# Altium PCB Stamp_C6LoRa_SMD.PcbDoc
Units mm, origin at the board's own origin, x right, y up, seen from the top; angles counter-clockwise.
Board outline 50.07 x 50.07 mm, 6 copper layers (Top/L1, GND/L2, L3, L4, PWR/L5, Bot/L6), stack 0.81 mm thick; 1 components, 79 nets, 88 pads, 0 vias.
Unrouted connection lines stored in the file: 58.
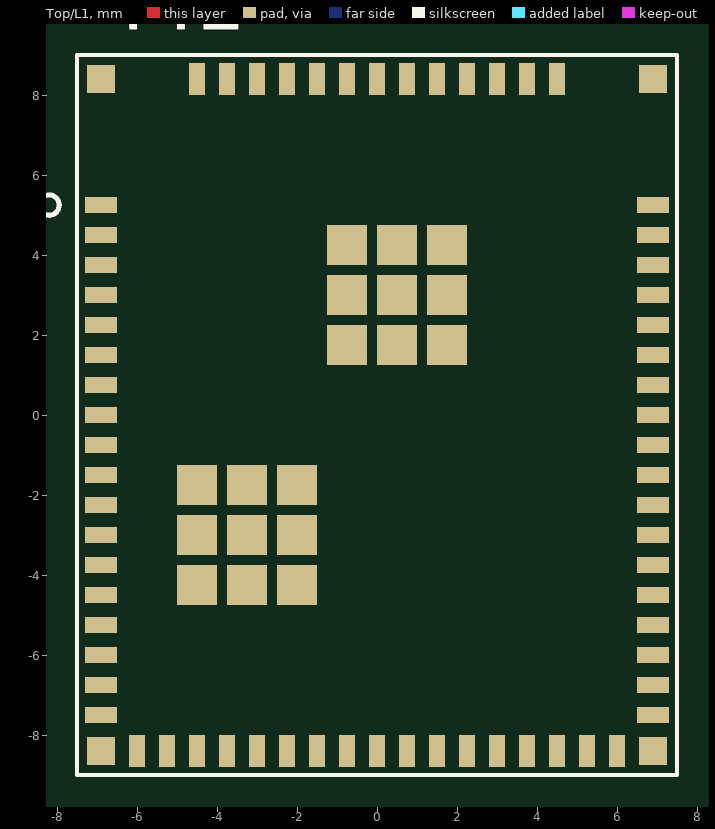
[diagram p0: Top/L1 view]
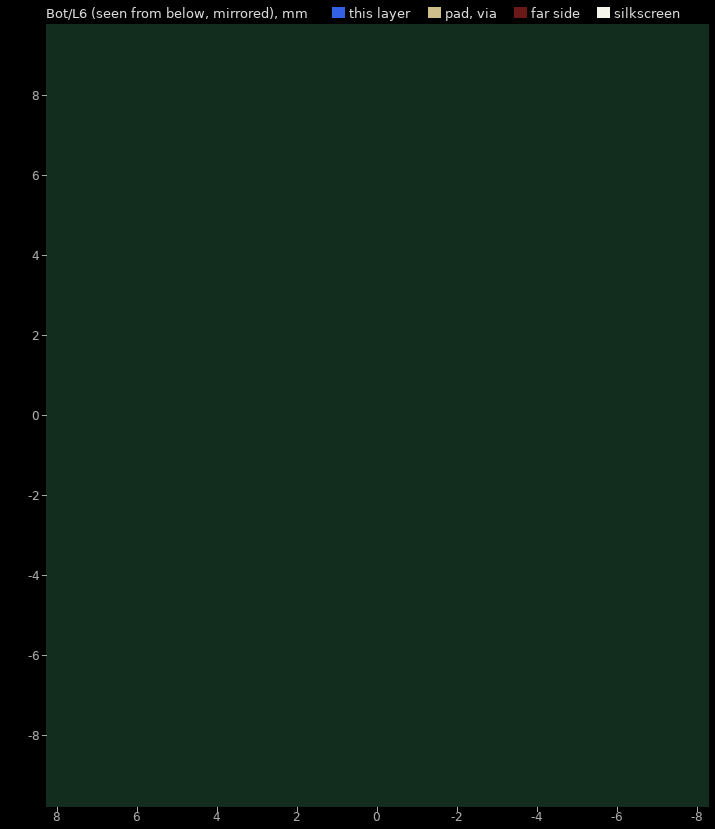
[diagram p1: Bot/L6 view, seen from below]

## Layer stack, top to bottom
Top Solder: solder mask 0.0102, Solder Resist, Dk 3.5
Top/L1: signal copper 0.0115
Dielectric 2: prepreg 0.125, PP-006, Dk 4.1
GND/L2: signal copper 0.0115
Dielectric 4: prepreg 0.194, PP-006, Dk 4.1
L3: signal copper 0.0115
Dielectric 1: dielectric 0.103, FR-4, Dk 4.8
L4: signal copper 0.0115
Dielectric 5: prepreg 0.194, PP-006, Dk 4.1
PWR/L5: signal copper 0.0115
Dielectric 3: prepreg 0.125, PP-006, Dk 4.1
Bot/L6: signal copper 0.0115
Bottom Solder: solder mask 0.0102, Solder Resist, Dk 3.5

## Board outline
-25,-25.036 -25.071,24.964 24.929,25.036 25,-24.964

## Design rules (kind name [scope] priority, off if disabled: settings)
Clearance [All] p1: gap=0.102 ignorepadtopadclearanceinfootprint=FALSE except(0.152: Arc-Hole Track-Hole SMDPad-Hole THPad-Hole Fill-Hole Poly-Hole Region-Hole Text-Hole; 0.229: Via-Hole)
HoleToHoleClearance [All] p1: gap=0.229 allowstackedmicrovias=TRUE
PlaneConnect [All] p1: planeconnectstyle=Direct reliefexpansion=0.508 reliefentries=4 reliefconductorwidth=0.254 reliefairgap=0.254
PolygonConnect [All] p1: connectstyle=Direct reliefconductorwidth=0.254 reliefentries=4 polygonreliefangle="90 Angle" airgapwidth=0.254
RoutingVias [All] p1: holewidth=0.711 width=1.27 viastyle="Through Hole" minholewidth=0.711 minwidth=1.27 maxholewidth=0.711 maxwidth=1.27 useviatemplates=TRUE viatemplateguid#1={14332959-58D8-491C-A986-AD0D1AAE09CF} viatemplatename#1=v30h17m0mx0
SolderMaskExpansion [All] p1: expansion=0.102 istentingtop=FALSE
Width [All] p1: maxlimit=0.889 minlimit=0.102 preferedwidth=0.33 midlayer3_minwidth=0.102 midlayer3_prefwidth=0.33 midlayer4_minwidth=0.102 midlayer4_prefwidth=0.33 minimp=50.000000 maximp=50.000000 favimp=50.000000
28 further rules are at their usual default settings.

## Classes and differential pairs
net class RF_50R: ESP_ANT ESP_ANT_T NetC1_1 NetC1_2 NetC3_2 NetC21_2 NetL7_2 SX_RFI_N SX_RFI_P SX_RFO SX_SRFI SX_SRFI_T SX_SRFO

## Components (designator, comment, footprint, x,y, rotation, side; value= is the part's Value field where it differs from the comment)
M1 "Comment" STAMP_C6_LORA_SMD 0,0 r0 top

## Footprints (in the part's own frame and the unit in brackets; to place one, negate y for a bottom-side part, rotate by r counter-clockwise, add the part's x,y. Pads: shape width x height; smd on the part's side, far side on the other; paste and mask are expansions set on the pad)
STAMP_C6_LORA_SMD [mm]
  rect 0.8x0.4 smd mask+0: 1(-6.9,5.25) 2(-6.9,4.5) 3(-6.9,3.75) 4(-6.9,3) 5(-6.9,2.25) 6(-6.9,1.5) 7(-6.9,0.75) 8(-6.9,0) 9(-6.9,-0.75) 10(-6.9,-1.5) 11(-6.9,-2.25) 12(-6.9,-3) 13(-6.9,-3.75) 14(-6.9,-4.5) 15(-6.9,-5.25) 16(-6.9,-6) 17(-6.9,-6.75) 18(-6.9,-7.5) 36(6.9,-7.5) 37(6.9,-6.75) 38(6.9,-6) 39(6.9,-5.25) 40(6.9,-4.5) 41(6.9,-3.75) 42(6.9,-3) 43(6.9,-2.25) 44(6.9,-1.5) 45(6.9,-0.75) 46(6.9,0) 47(6.9,0.75) 48(6.9,1.5) 49(6.9,2.25) 50(6.9,3) 51(6.9,3.75) 52(6.9,4.5) 53(6.9,5.25)
  rect 0.4x0.8 smd mask+0: 19(-6,-8.4) 20(-5.25,-8.4) 21(-4.5,-8.4) 22(-3.75,-8.4) 23(-3,-8.4) 24(-2.25,-8.4) 25(-1.5,-8.4) 26(-0.75,-8.4) 27(0,-8.4) 28(0.75,-8.4) 29(1.5,-8.4) 30(2.25,-8.4) 31(3,-8.4) 32(3.75,-8.4) 33(4.5,-8.4) 34(5.25,-8.4) 35(6,-8.4) 54(4.5,8.4) 55(3.75,8.4) 56(3,8.4) 57(2.25,8.4) 58(1.5,8.4) 59(0.75,8.4) 60(0,8.4) 61(-0.75,8.4) 62(-1.5,8.4) 63(-2.25,8.4) 64(-3,8.4) 65(-3.75,8.4) 66(-4.5,8.4)
  rect 0.7x0.7 smd mask+0.051: 67(-6.9,8.4) 68(-6.9,-8.4) 69(6.9,-8.4) 70(6.9,8.4)
  rect 1x1 smd mask+0.051: 71(-4.5,-4.25) 71(-4.5,-3) 71(-4.5,-1.75) 71(-3.25,-3) 71(-3.25,-1.75) 71(-3.25,-4.25) 71(-2,-4.25) 71(-2,-3) 71(-2,-1.75) 72(-0.75,1.75) 72(-0.75,3) 72(-0.75,4.25) 72(0.5,1.75) 72(0.5,3) 72(0.5,4.25) 72(1.75,3) 72(1.75,4.25) 72(1.75,1.75)
  silkscreen extent -8.45,-9 7.5,9, body extent -7.5,-9 7.5,9, height 1.8

## Nets (pads, with @x,y where several pads share a name; then routed paths per layer and width w, separated by ;. In a path a pad name is that pad's centre, name@x,y a point inside that pad or via, vN(x,y) a via of type N, cw(c..) or ccw(c..) an arc to the next point about the centre after c; other vN are vias at no path point)
ESP_ANT: 
ESP_ANT_T: 
ESP_nRST: 
ESP_U0RXD: 
ESP_U0TXD: 
EXT_P0: 
EXT_P1: 
EXT_P2: 
EXT_P3: 
EXT_P4: 
FLASH_CLK: 
FLASH_CS0: 
FLASH_D: 
FLASH_HD: 
FLASH_Q: 
FLASH_VCC: 
FLASH_WP: 
GND: 
GPIO2: 
GPIO4: 
GPIO5: 
GPIO6: 
GPIO7: 
GPIO8: 
GPIO9: 
GPIO10: 
GPIO11: 
GPIO15: 
GPIO18: 
IRQ_LINE: 
LORA_IRQ: 
MODULE_EN: 
NetC1_1: 
NetC1_2: 
NetC3_2: 
NetC4_1: 
NetC7_1: 
NetC17_1: 
NetC19_2: 
NetC21_2: 
NetC33_2: 
NetC44_1: 
NetL2_2: 
NetL7_2: 
NetL9_1: 
NetL9_2: 
NetR2_1: 
NetR6_2: 
NetR7_2: 
NetR14_1: 
SPI_CLK: 
SPI_MISO: 
SPI_MOSI: 
SX_32M_REF: 
SX_ANT_SW: 
SX_BUSY: 
SX_DIO2: 
SX_LNA_EN: 
SX_NRST: 
SX_NSS: 
SX_PAVDD: 
SX_RFI_N: 
SX_RFI_P: 
SX_RFO: 
SX_SRFI: 
SX_SRFI_T: 
SX_SRFO: 
SX_VREG: 
USB_D_N: 
USB_D_P: 
VBAT: 
VBAT_IN: 
VDD_3V3: 
VDD_OCXO: 
VDDP_3V3: 
XTAL_32K_N: 
XTAL_32K_P: 
XTAL_40M_N: 
XTAL_40M_P: 
pads on no net: M1.1 M1.2 M1.3 M1.4 M1.5 M1.6 M1.7 M1.8 M1.9 M1.10 M1.11 M1.12 M1.13 M1.14 M1.15 M1.16 M1.17 M1.18 M1.19 M1.20 M1.21 M1.22 M1.23 M1.24 M1.25 M1.26 M1.27 M1.28 M1.29 M1.30 M1.31 M1.32 M1.33 M1.34 M1.35 M1.36 M1.37 M1.38 M1.39 M1.40 M1.41 M1.42 M1.43 M1.44 M1.45 M1.46 M1.47 M1.48 M1.49 M1.50 M1.51 M1.52 M1.53 M1.54 M1.55 M1.56 M1.57 M1.58 M1.59 M1.60 M1.61 M1.62 M1.63 M1.64 M1.65 M1.66 M1.67 M1.68 M1.69 M1.70 M1.71 M1.72

## Silkscreen, mask and mechanical layers (free items; w line width, h text height)
Mechanical 1:
  the board outline again, w0.1